# Allegro board msd_foot_ext2.brd
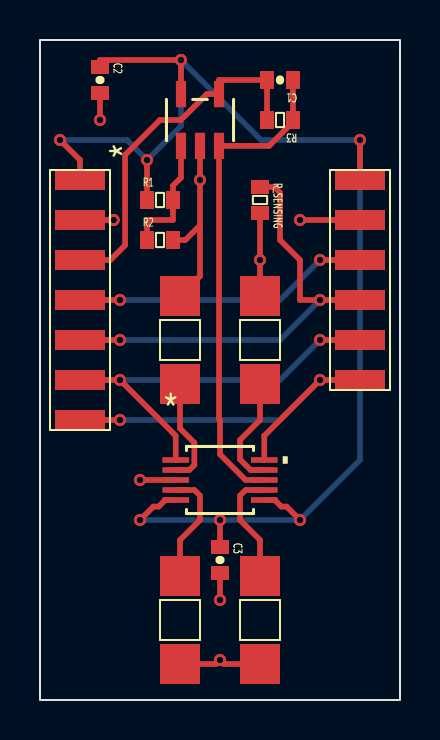
[diagram p0: board, top side]
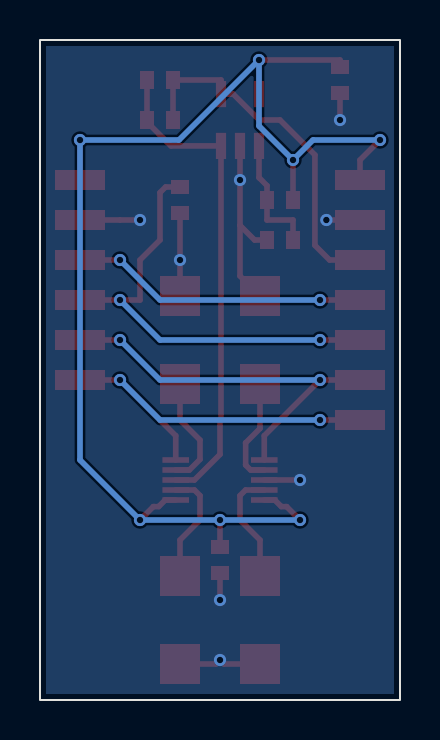
[diagram p1: board, bottom side, seen from below]

Outline 18 x 33 mm; copper layers: TOP, BOTTOM. Coordinates in mm from the lower left corner of the outline.
Outline path: rectangle 0,0 18,33

## Design rules (mm)
constraint set DEFAULT: min track width 0.127

## Placement (name value [footprint] x y rotation side)
C1  47pF  [0402-CAP]  12 31 180 top
C2  0.1uF  [0402-CAP]  3 31 270 top
C3  0.1uF  [0402-CAP]  9 7 270 top
IO2  -  [EXT1_EXT2_CONNECTOR]  2 20 0 top
IO3  -  [EXT2_EXT3_CONNECTOR]  16 21 0 top
NOREF  -  []  18 0 90 top
NOREF#2  -  []  0 33 0 top
R1  10k  [0402-RES]  6 25 0 top
R2  1k  [0402-RES]  6 23 0 top
R3  6.8k  [0402-RES]  12 29 180 top
R_SENSING  5k  [0402-RES]  11 25 270 top
SC1  Strain Cell  [STRAIN_CELL]  7 18 270 top
SC2  Strain Cell  [STRAIN_CELL]  11 18 270 top
SC3  Strain Cell  [STRAIN_CELL]  7 4 90 top
SC4  Strain Cell  [STRAIN_CELL]  11 4 90 top
U1  TMUX1104DGSR  [DGS10_TEX]  9 11 0 top
U2  MCP6001UT-EOT  [SOT-23-5_MC_MCH]  8 29 90 top

## Library data of the parts
C1-C3 = CAP NP
IO2 = EXT1_EXT2_CONNECTOR
IO3 = EXT2_EXT3_CONNECTOR
R1-R3 R_SENSING = R
SC1-SC4 = Strain Cell
U1 = TMUX1104DGSR: User Part Number: PN; Tolerance: TOL
U2 = MCP6001UT-EOT: User Part Number: PN; Tolerance: TOL

## Footprints (pads in the part's own frame, mm; a bottom-side part is the same pattern mirrored in y, then rotated)
0402-CAP
  rect 0.7x0.9 smd: 1(-0.65,0) 2(0.65,0)
0402-RES
  rect 0.7x0.9 smd: 1(-0.65,0) 2(0.65,0)
DGS10_TEX
  rect 1.328x0.279 smd: 1(-2.213,1) 2(-2.213,0.5) 3(-2.213,0) 4(-2.213,-0.5) 5(-2.213,-1) 6(2.213,-1) 7(2.213,-0.5) 8(2.213,0) 9(2.213,0.5) 10(2.213,1)
EXT1_EXT2_CONNECTOR
  rect 2.5x1 smd: 1(0,6) 2(0,4) 3(0,2) 4(0,0) 5(0,-2) 6(0,-4) 7(0,-6)
EXT2_EXT3_CONNECTOR
  rect 2.5x1 smd: 1(0,5) 2(0,3) 3(0,1) 4(0,-1) 5(0,-3) 6(0,-5)
SOT-23-5_MC_MCH
  rect 1.31x0.508 smd: 1(-1.295,0.95) 2(-1.295,0) 3(-1.295,-0.95) 4(1.295,-0.95) 5(1.295,0.95)
STRAIN_CELL
  rect 2x2 smd: 1(-2.2,0) 2(2.2,0)

## Nets
GND: C2.2 C3.2 IO2.2 IO3.2 R2.2 R_SENSING.2 SC1.1 SC2.1 SC3.1 SC4.1 U1.3 U2.2(VSS)
VDD: C2.1 C3.1 IO2.1(VDD) IO3.1(VDD) R1.1 U1.5 U1.6(VDD) U2.5
CNC: IO2.5 IO3.4 R_SENSING.1
SEL0: IO2.6 IO3.5 U1.1
SEL1: IO2.7 IO3.6 U1.10
VOUT: C1.2 IO2.3 R3.2 U2.4
N31390: C1.1 R3.1 U1.8 U2.3
N31520: R1.2 R2.1 U2.1
N31550: SC4.2 U1.7
N31558: SC3.2 U1.4
N31616: SC2.2 U1.9
N31624: SC1.2 U1.2
N32453: IO2.4 IO3.3

## Via types
v1: diameter 0.61, hole 0.33, TOP to BOTTOM, 23 vias

## Routing (per net, layer and track width the routed paths; a pad name or vN(x,y) marks a point on that pad's centre or on a via; arc(x,y) is an arc through that point)
GND: length 27.1
  TOP w0.281: SC1.1 8,21.2 8,23.73 ; R2.2 7.27,23 8,23.73 ; SC2.1 v1(11,22) R_SENSING.2 ; U2.2 v1(8,26) 8,23.73 ; C3.2 v1(9,5) ; SC3.1 8.8,1.8 v1(9,2) 9.2,1.8 SC4.1 ; IO2.2 v1(3.68,24) ; IO3.2 v1(13,24) ; C2.2 v1(3,29) ; U1.3 v1(5,11)
VDD: length 67.6
  TOP w0.281: v1(13,9) 12.33,9.67 12.07,9.67 11.74,10 U1.6 ; v1(5,9) 5.67,9.67 5.93,9.67 6.26,10 U1.5 ; IO2.1 2,27 v1(1,28) ; v1(5.35,27) R1.1 ; U2.5 v1(7.05,32) 3,32 C2.1 ; IO3.1 v1(16,28) ; C3.1 v1(9,9)
  BOTTOM w0.281: v1(1,28) 4.35,28 v1(5.35,27) 7.05,28.7 v1(7.05,32) 11.05,28 v1(16,28) 16,12 v1(13,9) v1(9,9) v1(5,9)
CNC: length 22.7
  TOP w0.281: R_SENSING.1 11.72,25.65 12,25.37 12,23 13,22 13,20 v1(14,20) IO3.4 ; IO2.5 v1(4,18)
  BOTTOM w0.281: v1(14,20) 12,18 v1(4,18)
SEL0: length 20
  TOP w0.281: IO3.5 v1(14,18) ; IO2.6 v1(4,16) 6.79,13.21 U1.1
  BOTTOM w0.281: v1(14,18) 12,16 v1(4,16)
SEL1: length 20
  TOP w0.281: U1.10 11.21,13.21 v1(14,16) IO3.6 ; IO2.7 v1(4,14)
  BOTTOM w0.281: v1(4,14) 12,14 v1(14,16)
VOUT: length 18.1
  TOP w0.281: R3.2 C1.2 8.95,31 U2.4 8.34,30.3 7.04,29 6,29 4.25,27.25 4.25,22.74 3.52,22 IO2.3
N31390: length 24.5
  TOP w0.281: U1.8 10.28,11 9,12.28 9,14 8.95,14.05 U2.3 11.45,27.7 12.65,28.9 R3.1 C1.1
N31520: length 6.2
  TOP w0.281: R2.1 5.35,24 6.65,24 R1.2 6.65,25.72 7.05,26.12 U2.1
N31550: length 5.8
  TOP w0.281: SC4.2 11,8 10,9 10,10.22 10.28,10.5 U1.7
N31558: length 5.8
  TOP w0.281: SC3.2 7,8 8,9 8,10.22 7.72,10.5 U1.4
N31616: length 5.6
  TOP w0.281: U1.9 10.53,11.5 10,12.03 10,13 11,14 SC2.2
N31624: length 5.4
  TOP w0.281: SC1.2 7,13.58 7.72,12.86 7.72,11.75 7.47,11.5 U1.2
N32453: length 14.8
  TOP w0.281: IO2.4 v1(4,20) ; IO3.3 v1(14,22)
  BOTTOM w0.281: v1(14,22) 12,20 v1(4,20)

## Copper pours and planes (outline as drawn; the poured copper is in the pictures)
GND on BOTTOM: 0.3,32.7 17.7,32.7 17.7,0.3 0.3,0.3
